# EAGLE board master1 (EAGLE 9.5.2)
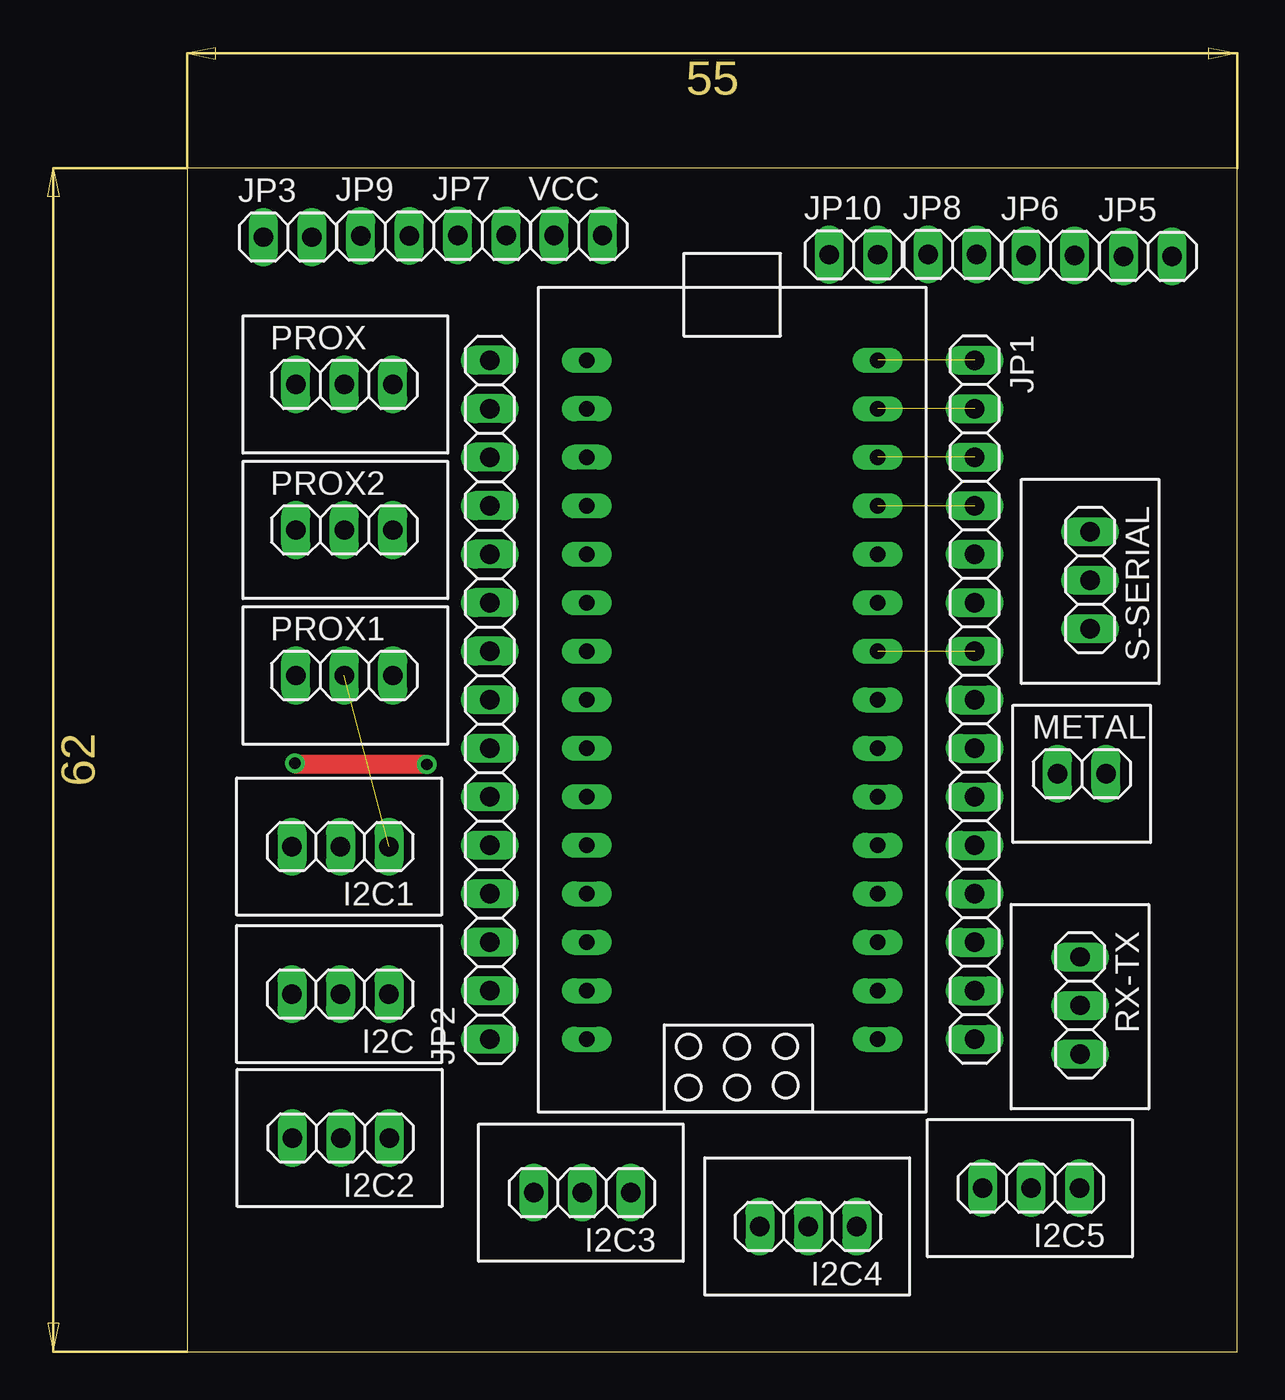
[diagram p0: board, top side]
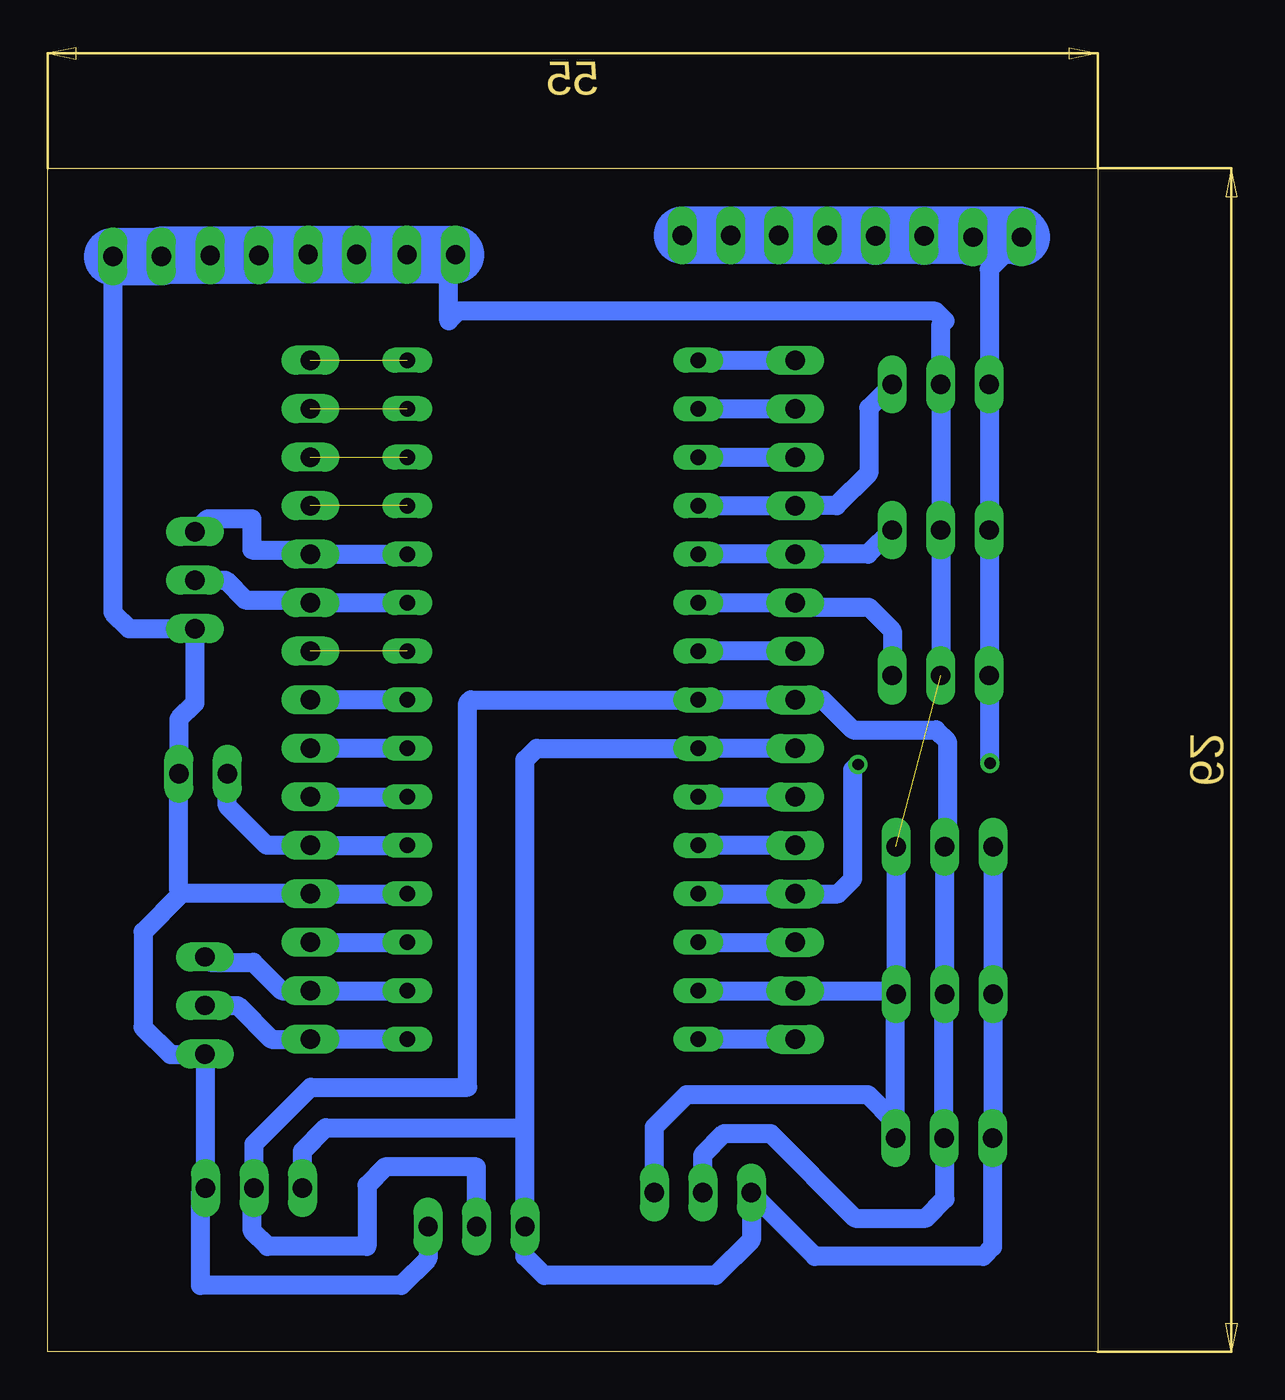
[diagram p1: board, bottom side, seen from below]

Size 55 x 62 mm. Coordinates in mm from the lower left corner, seen from the top.
Outline: 0,0 55,0 55,62 0,62 0,0
Copper layers (1*16): Top 0.035mm / dielectric 1.5mm / Bottom 0.035mm
Design rules "default *": minimum track width 6mil, minimum drill 0.35mm, track to track 1mm, track to pad 1mm, pad to pad 1mm, via to via 1mm, smd to smd 6mil, copper to edge 40mil, drill to drill 6mil, minimum pad ring 10mil, minimum via ring 8mil, stop-mask expansion 4mil, vias tented up to drill 0mil, thermal gap 10mil

## Footprints (pad centres in the part's own frame; a part is rotated, then mirrored left to right if it is on the bottom)
1X03_DATA = drill 1.016 long: 1 -2.54,0; 2 0,0; 3 2.54,0
1X15 = drill 1.016 long: 1 -17.78,0; 2 -15.24,0; 3 -12.7,0; 4 -10.16,0; 5 -7.62,0; 6 -5.08,0; 7 -2.54,0; 8 0,0; 9 2.54,0; 10 5.08,0; 11 7.62,0; 12 10.16,0; 13 12.7,0; 14 15.24,0; 15 17.78,0
1X02 = drill 1.016 long: 1 -1.27,0; 2 1.27,0
1X02_DATA = drill 1.016 long: 1 -1.27,0; 2 1.27,0
NANO = drill 0.8 long: 3.3V -10.16,24.13; 5V -10.16,-1.27; A0 -10.16,19.05; A1 -10.16,16.51; A2 -10.16,13.97; A3 -10.16,11.43; A4 -10.16,8.89; A5 -10.16,6.35; A6 -10.16,3.81; A7 -10.16,1.27; AREF -10.16,21.59; D2 5.08,1.27; D3 5.08,3.81; D4 5.08,6.35; D5 5.08,8.89; D6 5.08,11.43; D7 5.08,13.97; D8 5.08,16.51; D9 5.08,19.05; D10 5.08,21.59; D11 5.08,24.13; D12 5.08,26.67; D13 -10.16,26.67; GND -10.16,-6.35; GND1 5.08,-1.27; RAW -10.16,-8.89; RST -10.16,-3.81; RST1 5.08,-3.81; RX1 5.08,-6.35; TX0 5.08,-8.89

## Placement (x,y rotation side)
I2C  [1X03_DATA]  8.03,18.74 180 top
I2C1  [1X03_DATA]  8.03,26.46 180 top
I2C2  [1X03_DATA]  8.05,11.2 180 top
I2C3  [1X03_DATA]  20.69,8.33 180 top
I2C4  [1X03_DATA]  32.54,6.56 180 top
I2C5  [1X03_DATA]  44.2,8.57 180 top
JP1  [1X15]  41.25,34.15 270 top
JP2  [1X15]  15.85,34.15 90 top
JP3  [1X02]  5.27,58.38 0 top
JP5  [1X02]  50.32,57.37 0 top
JP6  [1X02]  45.22,57.43 0 top
JP7  [1X02]  15.44,58.47 0 top
JP8  [1X02]  40.09,57.47 0 top
JP9  [1X02]  10.37,58.44 0 top
JP10  [1X02]  34.91,57.46 0 top
METAL  [1X02_DATA]  46.86,30.27 0 top
PROX  [1X03_DATA]  8.23,50.66 0 top
PROX1  [1X03_DATA]  8.23,35.42 0 top
PROX2  [1X03_DATA]  8.23,43.04 0 top
RX-TX  [1X03_DATA]  46.77,18.14 270 top
S-SERIAL  [1X03_DATA]  47.3,40.41 270 top
U$1  ARDUINO_NANO  [NANO]  31.09,25.26 0 top
VCC  [1X02]  20.49,58.47 0 top

## Library data of the parts
I2C I2C1-I2C5 JP1-JP3 JP5-JP10 METAL PROX PROX1 PROX2 RX-TX S-SERIAL VCC = MIA_LIBRARY-2-2-2
U$1 = MIA_LIBRARY

## Nets
A0: JP2.12 PROX.3 U$1.A0
A1: JP2.11 PROX2.3 U$1.A1
A2: JP2.10 PROX1.3 U$1.A2
GND: I2C1.1 I2C2.1 I2C3.1 I2C4.1 I2C5.1 I2C.1 JP1.12 JP2.2 JP5.1 JP5.2 JP6.1 JP6.2 JP8.1 JP8.2 JP10.1 JP10.2 METAL.2 PROX1.2 PROX2.2 PROX.2 RX-TX.3 S-SERIAL.3 U$1.GND U$1.GND1
N$1: JP2.1 U$1.RAW
N$2: JP1.3 U$1.D10
N$3: JP2.3 U$1.RST
N$4: JP1.2 U$1.D11
N$5: JP2.5 U$1.A7
N$6: JP2.6 U$1.A6
N$9: JP2.9 U$1.A3
N$13: JP2.13 U$1.AREF
N$14: JP2.14 U$1.3.3V
N$15: JP2.15 U$1.D13
N$16: JP1.1 U$1.D12
N$19: JP1.4 U$1.D9
N$22: JP1.7 U$1.D6
N$23: JP1.8 U$1.D5
N$24: JP1.9 U$1.D4
N$25: JP1.10 U$1.D3
N$26: JP1.11 METAL.1 U$1.D2
N$28: JP1.13 U$1.RST1
N$29: JP1.14 RX-TX.1 U$1.RX1
N$30: JP1.15 RX-TX.2 U$1.TX0
R-SERIAL: JP1.6 S-SERIAL.2 U$1.D7
SCL: I2C1.3 I2C2.3 I2C3.3 I2C4.3 I2C5.3 I2C.3 JP2.7 U$1.A5
SDA: I2C1.2 I2C2.2 I2C3.2 I2C4.2 I2C5.2 I2C.2 JP2.8 U$1.A4
T-SERIAL: JP1.5 S-SERIAL.1 U$1.D8
VCC: JP2.4 JP3.1 JP3.2 JP7.1 JP7.2 JP9.1 JP9.2 PROX1.1 PROX2.1 PROX.1 U$1.5V VCC.1 VCC.2

## Tracks (layer width: path | path; a pad name or v marks a point on that pad's centre or on a via)
A0
  Bottom 1: PROX.3 12,49.43 12,46 13.69,44.31 JP2.12 U$1.A0
A1
  Bottom 1: PROX2.3 12.04,41.77 JP2.11 U$1.A1
A2
  Bottom 1: U$1.A2 JP2.10 15.62,39 12,39 10.77,37.77 PROX1.3
GND  (1 unrouted)
  Bottom 1: PROX1.2 PROX2.2 PROX.2 8.23,53.77 8,54 8.5,54.5 33.5,54.5 34,54 34,57.1 JP10.1 | JP5.2 51.59,38.72 50.74,37.87 S-SERIAL.3 47.3,33.96 48.13,33.13 METAL.2 48.13,24.13 48,24 | 48,24 JP1.12 U$1.GND1 | U$1.GND1 36.01,23.99 36,24 U$1.GND1 | 46.74,15.57 I2C5.1 47,8.31 47,3.48 36.48,3.48 35.08,4.88 I2C4.1 | 46.74,15.57 RX-TX.3 | I2C1.1 I2C.1 | I2C2.1 10.59,12 | 10.59,12 10.59,18.72 I2C.1 | I2C.1 10.74,18.91 JP2.2 U$1.GND | I2C3.1 23.23,11.77 21.53,13.47 12.06,13.47 10.59,12 | 48,24 50,22 50,17 48.57,15.57 46.74,15.57
  Bottom 3: JP10.1 JP10.2 JP8.1 JP8.2 43.91,57.47 JP6.1 JP6.2 48.99,57.43 JP5.1 JP5.2
N$1
  Bottom 1: JP2.1 U$1.RAW
N$2  (1 unrouted)
N$3
  Bottom 1: U$1.RST JP2.3
N$4  (1 unrouted)
N$5
  Bottom 1: JP2.5 U$1.A7
N$6
  Bottom 1: U$1.A6 JP2.6
N$9
  Bottom 1: JP2.9 U$1.A3
N$13
  Bottom 1: U$1.AREF JP2.13
N$14
  Bottom 1: U$1.3.3V JP2.14
N$15
  Bottom 1: U$1.D13 JP2.15
N$16  (1 unrouted)
N$19  (1 unrouted)
N$22  (1 unrouted)
N$23
  Bottom 1: U$1.D5 JP1.8
N$24
  Bottom 1: U$1.D4 JP1.9
N$25
  Bottom 1: JP1.10 U$1.D3
N$26
  Bottom 1: U$1.D2 JP1.11 43.53,26.53 45.59,28.59 METAL.1
N$28
  Bottom 1: JP1.13 U$1.RST1
N$29
  Bottom 1: RX-TX.1 46.49,20.4 44.23,20.4 42.74,18.91 JP1.14 U$1.RX1
N$30
  Bottom 1: RX-TX.2 45.06,18.14 43.29,16.37 JP1.15 U$1.TX0
R-SERIAL
  Bottom 1: S-SERIAL.2 45.69,40.41 44.66,39.38 41.4,39.38 JP1.6 U$1.D7
SCL
  Bottom 1: 30,11.73 40.44,11.73 41.66,10.51 I2C5.3 | 30,11.73 30,31 29.39,31.61 U$1.A5 JP2.7 | 30,11.73 I2C4.3 30,5 29,4 20,4 18.15,5.85 I2C3.3 14.82,5 6,5 5.51,5.49 I2C2.3 5.49,11.22 I2C.3 I2C1.3
SDA
  Bottom 1: I2C3.2 20.69,10.31 19.57,11.43 17.14,11.43 12.71,7 9,7 8,8 8,11.15 I2C2.2 8.05,18.72 I2C.2 I2C1.2 7.88,26.61 7.88,31.98 8.47,32.57 12.82,32.57 14.4,34.15 JP2.8 U$1.A4 32.85,34.15 33,34 33,13.86 41.23,13.86 44.2,10.89 I2C5.2 44.29,8.48 44.29,6.32 43.49,5.52 38.28,5.52 38.28,8.73 37.33,9.68 32.54,9.68 I2C4.2
T-SERIAL
  Bottom 1: S-SERIAL.1 46.62,43.63 44.31,43.63 44.31,42 41.48,42 JP1.5 U$1.D8
VCC  (via drill 0.6 pad 0.95)
  Top 1: v12.56,30.76 5.71,30.76 v5.65,30.82
  Bottom 1: JP3.1 5.69,56.69 PROX.1 PROX2.1 PROX1.1 5.65,35.38 v5.65,30.82 | U$1.5V JP2.4 13.61,23.99 12.83,24.77 12.83,30.49 v12.56,30.76
  Bottom 3: JP3.1 4.09,58.47 6.63,58.47 | 9.13,58.47 11.67,58.47 | 11.67,58.47 JP7.1 JP7.2 VCC.2 VCC.1 | JP3.2 6.63,58.47 | 6.63,58.47 9.13,58.47 | JP9.1 9.13,58.47 | JP9.2 11.67,58.47